# Altium PCB e3_ej4.PcbDoc
Units mm, origin at the board's own origin, x right, y up, seen from the top; angles counter-clockwise.
Board outline 65 x 50 mm, 2 copper layers (Top Layer, Bottom Layer); 20 components, 17 nets, 71 pads, 0 vias.
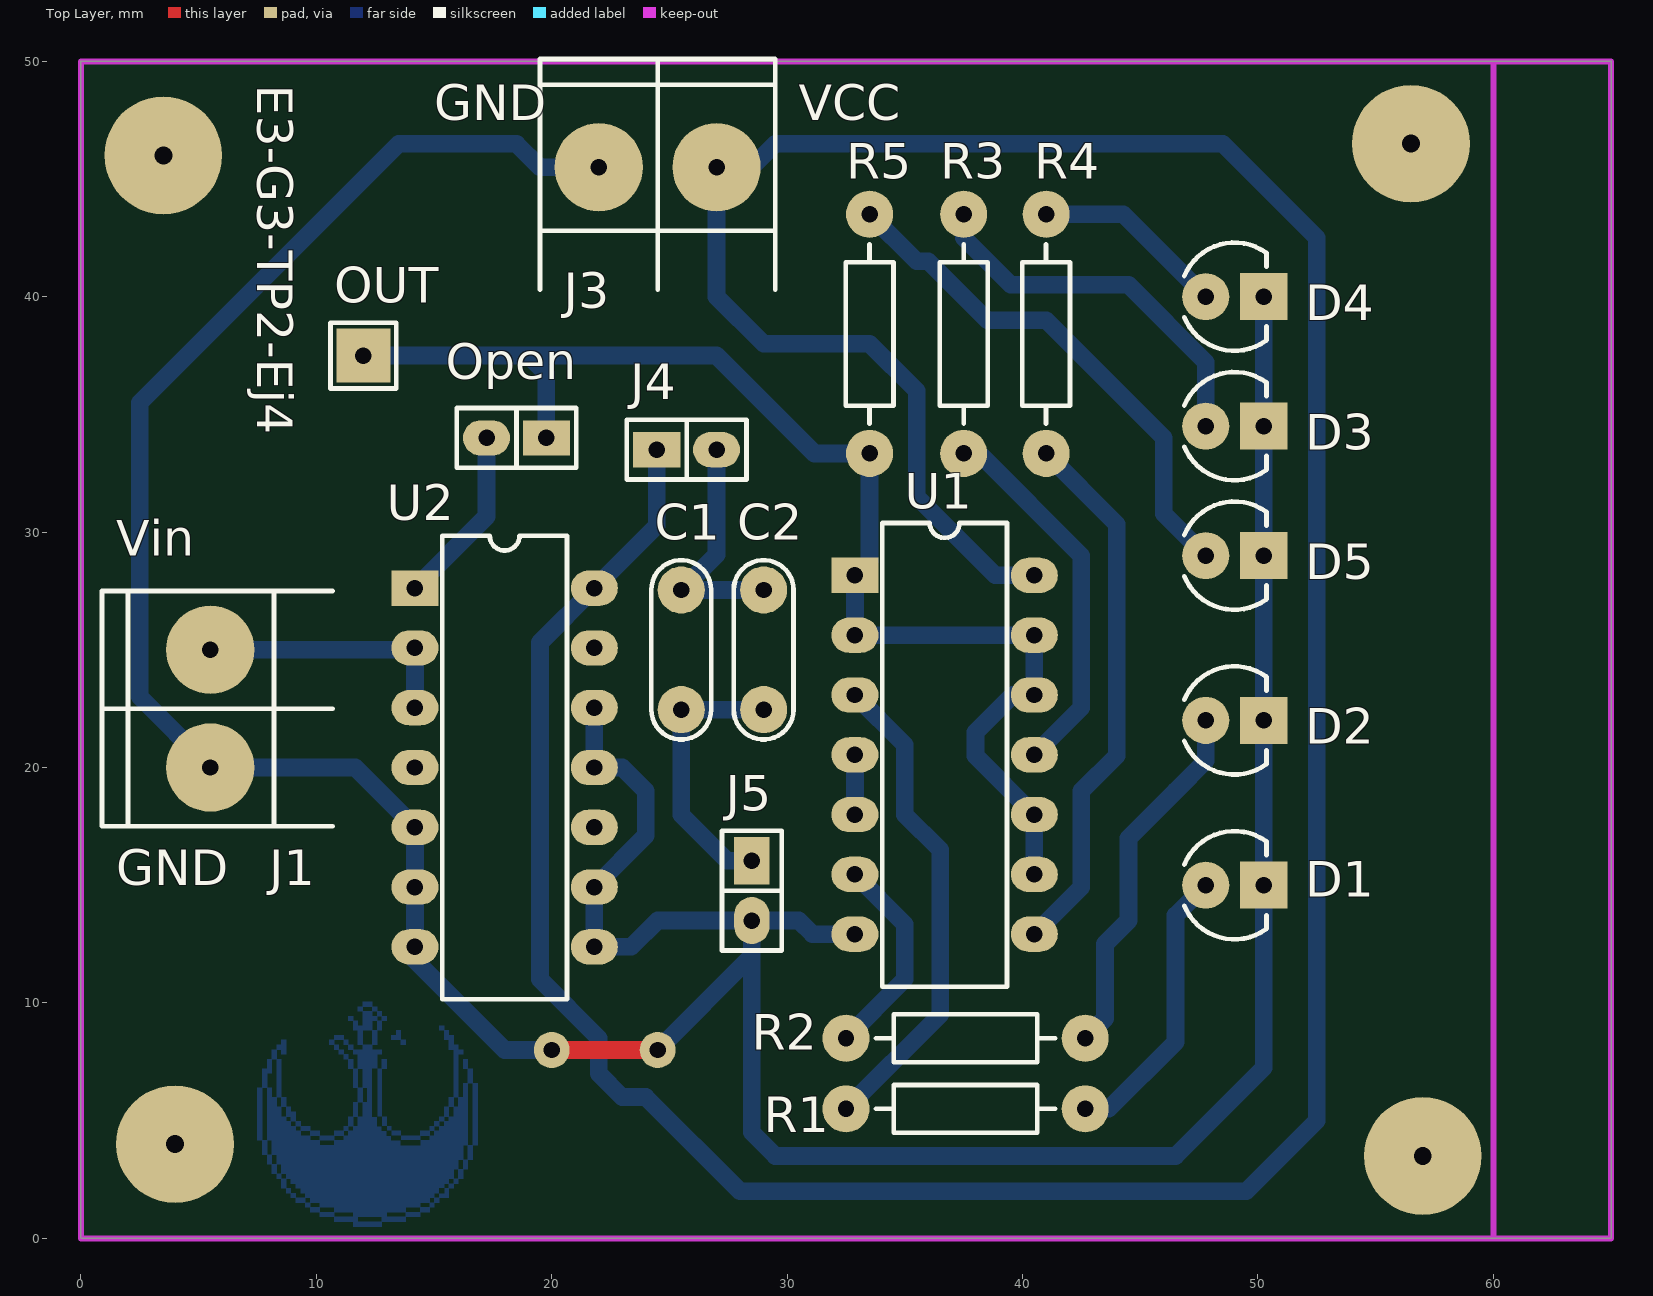
[diagram p0: Top Layer view]
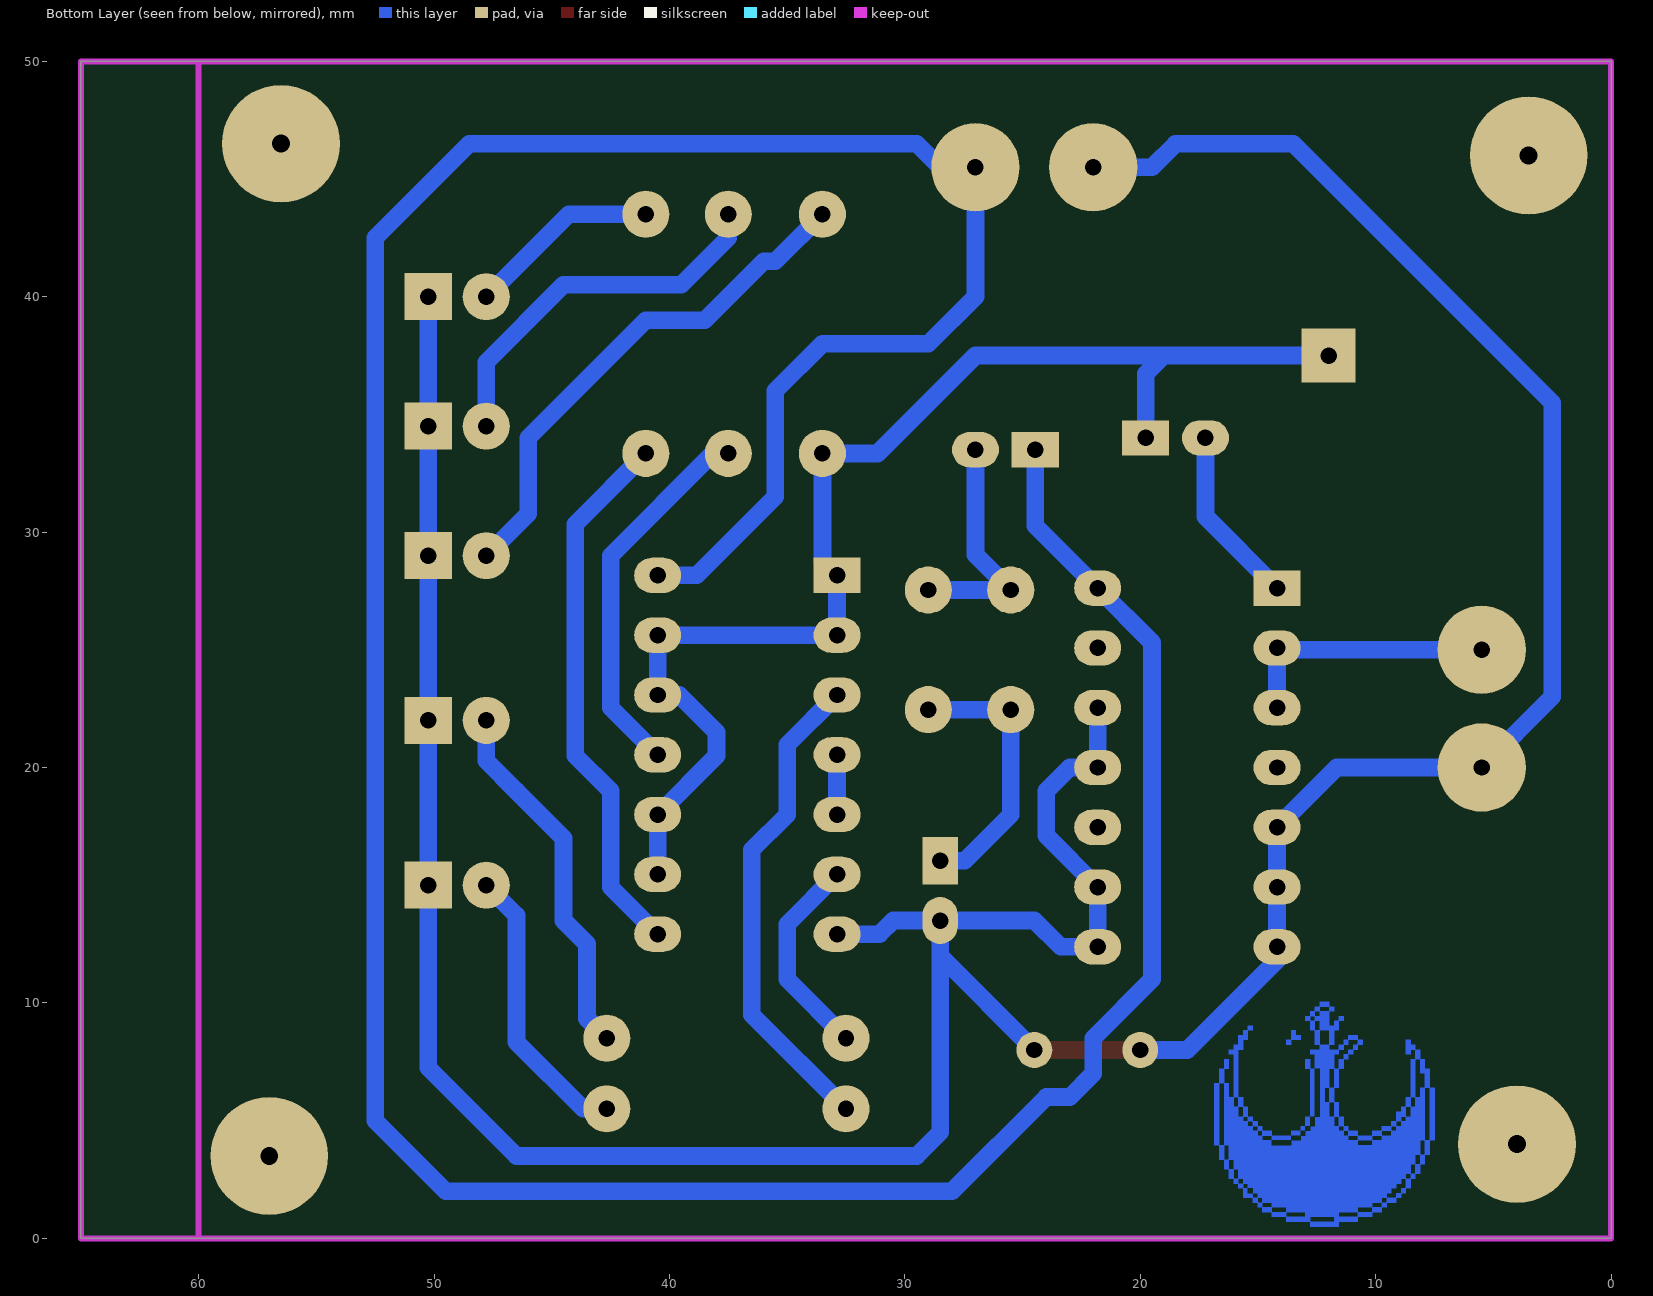
[diagram p1: Bottom Layer view, seen from below]
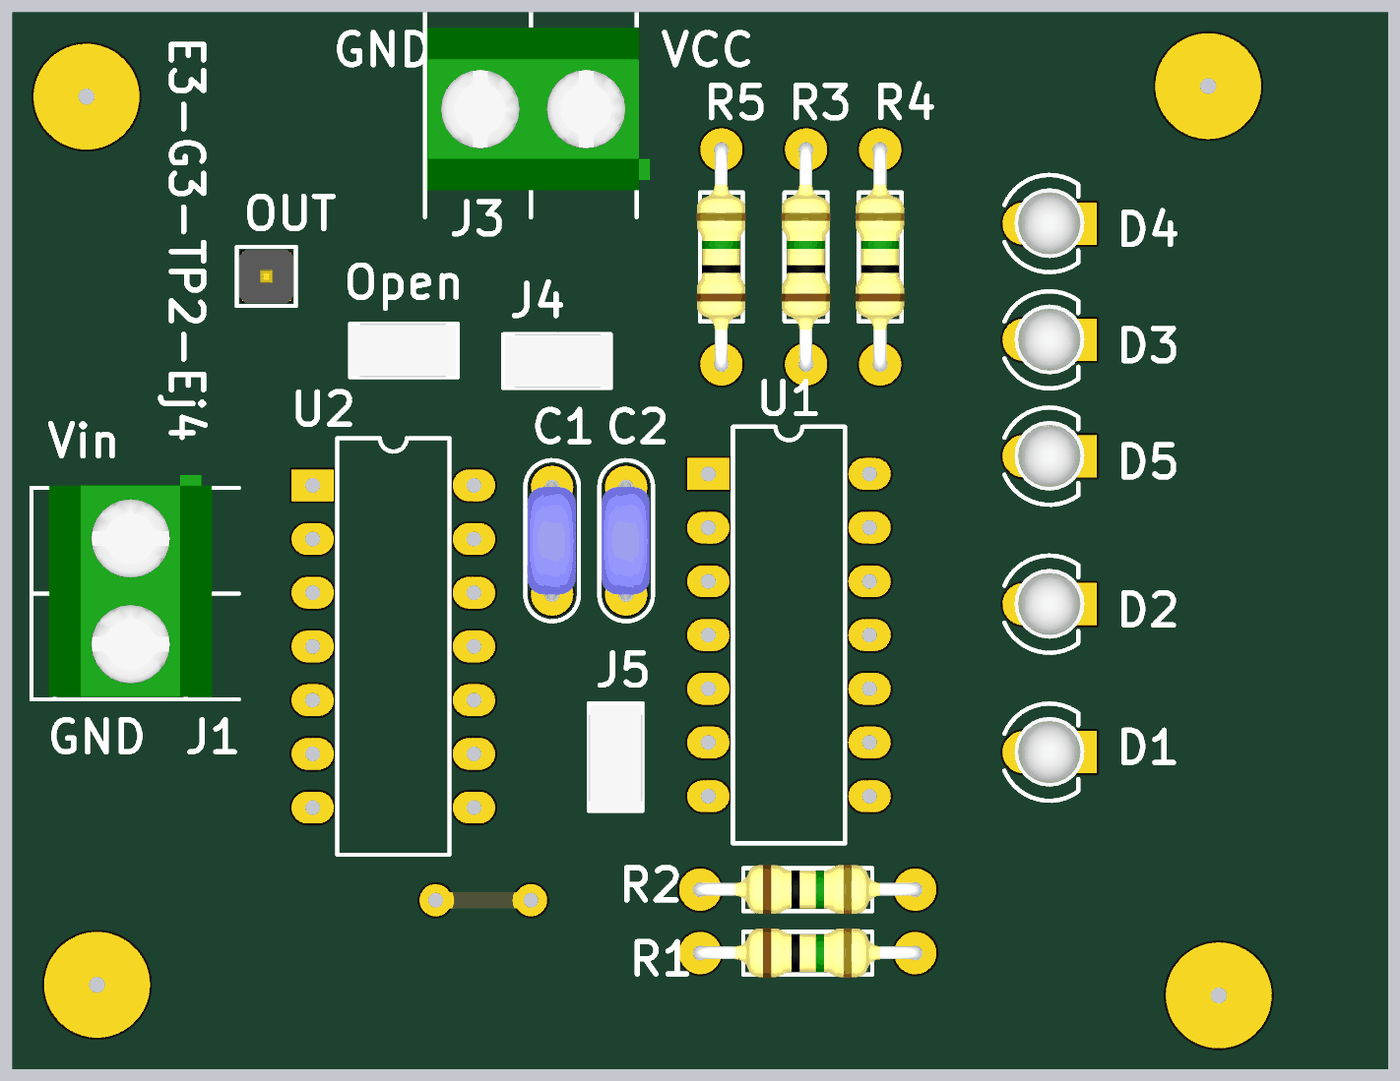
[diagram p2: 3D render of the assembled board from above, using the file's embedded part models]

## Layer stack, top to bottom
Top Solder: solder mask 0.0102, Solder Resist, Dk 3.5
Top Layer: signal copper 0.0356
Dielectric 1: dielectric 0.32, FR-4, Dk 4.8
Bottom Layer: signal copper 0.0356
Bottom Solder: solder mask 0.0102, Solder Resist, Dk 3.5

## Board outline
0,0 65,0 65,50 0,50

## Design rules (kind name [scope] priority, off if disabled: settings)
Clearance [All] p1: gap=0.4 ignorepadtopadclearanceinfootprint=FALSE
PolygonConnect [All] p1: connectstyle=Relief reliefconductorwidth=0.254 reliefentries=4 polygonreliefangle="90 Angle" airgapwidth=0.254
RoutingVias [All] p1: holewidth=0.5 width=2 viastyle="Through Hole" minholewidth=0.5 minwidth=2 maxholewidth=0.5 maxwidth=2
SolderMaskExpansion [All] p1: expansion=0.102
Width [All] p1: maxlimit=0.8 minlimit=0.75 preferedwidth=0.75
30 further rules are at their usual default settings.

## Components (designator, comment, footprint, x,y, rotation, side; value= is the part's Value field where it differs from the comment)
C1 "CAP" CAP200 25.5,25 r270 top
C2 "CAP" CAP200 29,25 r270 top
D1 "LED" LED3 49,15 r0 top
D2 "LED" LED3 49,22 r0 top
D3 "LED" LED3 49,34.5 r0 top
D4 "LED" LED3 49,40 r0 top
D5 "LED" LED3 49,29 r0 top
J1 "Vin" BORNERA2 5.5,22.5 r0 top
J3 "Alimentacion" BORNERA2 24.5,45.5 r270 top
J4 "desacople+" JUMPER2 25.73,33.5 r0 top locked
J5 "descople0" JUMPER2 28.5,14.77 r270 top locked
Open "JUMPER" JUMPER2 18.5,34 r180 top locked (schematic designator J2)
OUT "TP" TPTH 12,37.5 r0 top (schematic designator TP1)
R1 "RES" RES400 32.5,5.5 r0 top
R2 "RES" RES400 32.5,8.5 r0 top
R3 "RES" RES400 37.5,33.34 r90 top
R4 "RES" RES400 41,33.34 r90 top
R5 "RES" RES400 33.5,33.34 r90 top
U1 "SN74LS00N" 646-06 36.69,20.54 r270 top locked
U2 "MC74HC02AN" 646-06 18,20 r270 top locked

## Footprints (in the part's own frame and the unit in brackets; to place one, negate y for a bottom-side part, rotate by r counter-clockwise, add the part's x,y. Pads: shape width x height; smd on the part's side, far side on the other; paste and mask are expansions set on the pad)
646-06 [mm] "DIP; 14 Leads; Row Spacing 7.62 mm; Pitch 2.54 mm"
  rect 1.5x2 hole 0.7: 1(-7.62,-3.81)
  oval 1.5x2 hole 0.7: 2(-5.08,-3.81) 3(-2.54,-3.81) 4(0,-3.81) 5(2.54,-3.81) 6(5.08,-3.81) 7(7.62,-3.81) 8(7.62,3.81) 9(5.08,3.81) 10(2.54,3.81) 11(0,3.81) 12(-2.54,3.81) 13(-5.08,3.81) 14(-7.62,3.81)
  silkscreen extent -9.85,-2.65 9.85,2.65
BORNERA2 [mm] "Bornera con Tornillos 5mm separación"
  round 3.75 hole 0.7: 1(0,2.5) 2(0,-2.5)
  silkscreen extent -4.6,-5 5.2,5, body extent -3.76,-4.89 3.94,5.61, height 10
CAP200 [mm]
  round 2 hole 0.7: 1(-2.54,0) 2(2.54,0)
  silkscreen extent -3.81,-1.27 3.81,1.27, body extent -2.79,-1.17 2.79,1.12, height 6.24
JUMPER2 [mm]
  rect 2x1.5 hole 0.7: 1(-1.27,0)
  oval 2x1.5 hole 0.7: 2(1.27,0)
  silkscreen extent -2.54,-1.27 2.54,1.27, body extent -2.46,-1.27 2.54,1.27, height 9.5
LED3 [mm]
  round 2 hole 0.7: 1(-1.219,0)
  rect 2x2 hole 0.7: 2(1.245,0)
  silkscreen extent -2.13,-2.3 1.36,2.3, body extent -1.65,-1.63 1.65,1.66, height 0.49
RES400 [mm]
  round 2 hole 0.7: 1(0,0) 2(10.16,0)
  silkscreen extent 1.27,-1.02 8.89,1.02, body extent -0.3,-1.14 10.46,1.17, height 2.43
TPTH [mm]
  rect 2.3x2.3 hole 0.7: 1(0,0)
  silkscreen extent -1.4,-1.4 1.4,1.4, body extent -1.27,-1.27 1.27,1.27, height 6.04

## Part data
J1 J3: library part "BORNERA 2"
J4 J5: library part JUMPER
U1: "Quad 2-Input NAND Gate", ComponentAvailability="Not for New Design", ComponentLink1Description="Manufacturer Link", ComponentLink1URL=http://www.onsemi.com/, ComponentLink2Description=Datasheet, ComponentLink2URL=http://www.onsemi.com/pub/Collateral/SN74LS00-D.PDF, DatasheetVersion=Dec-1999, PackageDescription="DIP; 14 Leads; Row Spacing 7.62 mm; Pitch 2.54 mm", PackageReference=646-06, PackageVersion=1995, Published=15-Apr-2002, Publisher="Altium Limited"
U2: "Quad 2-Input NOR Gate", ComponentLink1Description="Manufacturer Link", ComponentLink1URL=http://www.onsemi.com/, ComponentLink2Description=Datasheet, ComponentLink2URL=http://www.onsemi.com/pub/Collateral/MC74HC02A-D.PDF, DatasheetVersion=Mar-2000, PackageDescription="DIP; 14 Leads; Row Spacing 7.62 mm; Pitch 2.54 mm", PackageReference=646-06, PackageVersion=1995, Published=15-Apr-2002, Publisher="Altium Limited"

## Free pads (board coordinates)
  round 1.524 hole 0.7: 2(20,8) 3(24.5,8) 4(24.5,8) 5(20,8)
  round 5 hole 0.762: 6(56.5,46.5) 7(3.5,46) 8(4,4) 8(57,3.5)

## Nets (pads, with @x,y where several pads share a name; then routed paths per layer and width w, separated by ;. In a path a pad name is that pad's centre, name@x,y a point inside that pad or via, vN(x,y) a via of type N, cw(c..) or ccw(c..) an arc to the next point about the centre after c; other vN are vias at no path point)
GND: D1.2 D2.2 D3.2 D4.2 D5.2 J1.2 J3.2 J5.2 pad.2 pad.3 pad.4 pad.5 U1.7 U2.5 U2.6 U2.7 U2.8 U2.9 U2.11 U2.12 | length 164.1
  Top Layer w0.75: pad.2 pad.3
  Bottom Layer w0.75: pad.2 18,8 14.19,11.81 U2.7 U2.6 U2.5 11.65,20 J1.2 2.5,23 2.5,35.5 13.5,46.5 18.5,46.5 19.5,45.5 J3.2 ; U2.12 U2.11 23,20 24,19 24,17.11 U2.9 U2.8 23.38,12.38 24.5,13.5 J5.2 ; pad.3 28.5,12 ; U1.7 31.08,12.92 30.5,13.5 J5.2 ; D4.2 D3.2 D5.2 D2.2 D1.2 50.245,7.245 46.5,3.5 29.5,3.5 28.5,4.5 28.5,12 ; 28.5,12 J5.2
NetC1_1: C1.1 C2.1 J4.2 | length 10.1
  Bottom Layer w0.75: J4.2 27,29.04 C1.1 C2.1
NetC1_2: C1.2 C2.2 J5.1 | length 11.8
  Bottom Layer w0.75: J5.1 27.46,16.04 25.5,18 C1.2 C2.2
NetD1_1: D1.1 R1.2 | length 12.2
  Bottom Layer w0.75: R1.2 43.66,5.5 46.5,8.34 46.5,13.719 D1.1
NetD2_1: D2.1 R2.2 | length 15.6
  Bottom Layer w0.75: R2.2 43.5,9.34 43.5,12.5 44.5,13.5 44.5,17 46.5,19 47.781,20.281 D2.1
NetD3_1: D3.1 R3.2 | length 16.2
  Bottom Layer w0.75: R3.2 37.5,42.5 39.5,40.5 44.5,40.5 47.781,37.219 D3.1
NetD4_1: D4.1 R4.2 | length 8.2
  Bottom Layer w0.75: R4.2 44.281,43.5 D4.1
NetD5_1: D5.1 R5.2 | length 22.2
  Bottom Layer w0.75: R5.2 35.5,41.5 36,41.5 38.5,39 41,39 46,34 46,30.781 D5.1
NetJ2_1: Open.1 OUT.1 R5.1 U1.1 U1.2 U1.9 U1.10 U1.12 U1.13 | length 55.6
  Bottom Layer w0.75: OUT.1 19,37.5 ; Open.1 19.77,36.73 19,37.5 ; U1.2@32.76,25.5 U1.2 ; U1.9 U1.10 38,20.5 38,21.5 39.58,23.08 U1.12 U1.13 U1.2 ; 19,37.5 27,37.5 31.16,33.34 R5.1 33.5,28.78 U1.1 U1.2
NetJ2_2: Open.2 U2.1 | length 7.6
  Bottom Layer w0.75: U2.1 17.23,30.66 Open.2
NetR1_1: R1.1 U1.3 | length 20.7
  Bottom Layer w0.75: R1.1 36.5,9.5 36.5,16.5 35,18 35,20.96 U1.3
NetR2_1: R2.1 U1.6 | length 8.9
  Bottom Layer w0.75: R2.1 35,11 35,13.34 U1.6
NetR3_1: R3.1 U1.11 | length 16.1
  Bottom Layer w0.75: R3.1 38.16,33.34 42.5,29 42.5,22.54 U1.11
NetR4_1: R4.1 U1.8 | length 23.1
  Bottom Layer w0.75: U1.8 42.5,14.92 42.5,19 44,20.5 44,30.34 R4.1
NetU1_4: U1.4 U1.5 | length 2.5
  Bottom Layer w0.75: U1.5 U1.4
VCC: J3.1 J4.1 U1.14 U2.14 | length 155
  Bottom Layer w0.75: J4.1 24.46,30.27 U2.14 19.5,25.31 19.5,11 22,8.5 22,7 23,6 24,6 28,2 49.5,2 52.5,5 52.5,42.5 48.5,46.5 29.5,46.5 28.5,45.5 J3.1 27,40 29,38 33.5,38 35.5,36 35.5,31.5 38.84,28.16 U1.14
Vin: J1.1 U2.2 U2.3 | length 11.3
  Bottom Layer w0.75: J1.1 14.11,25 U2.2 U2.3
pads on no net: U2.4 U2.10 U2.13

## Keep-outs
Keep-Out Layer:
  lines w0.254: 15,0 0,0 ; 60,0 60,50 ; 0,0 0,50 65,50 65,0 0,0

## Other copper
Bottom Layer:
  region: 579 vertices and 2 holes, not listed, extent 7.5,0.5 16.644,9.847
  region: 16.441,7.409 16.441,7.206 16.644,7.206 16.644,7.002 16.644,6.799 16.644,6.596 16.847,6.596 16.847,6.393 16.847,6.19 16.847,5.986 16.847,5.783 16.847,5.58 16.847,5.377 16.847,5.174 16.847,4.97 16.847,4.767 16.847,4.564 16.847,4.361 16.847,4.158 16.847,3.954 16.644,3.954 16.644,4.158 16.644,4.361 16.644,4.564 16.644,4.767 16.644,4.97 16.644,5.174 16.644,5.377 16.644,5.58 16.644,5.783 16.644,5.986 16.644,6.19 16.644,6.393 16.644,6.596 16.441,6.596 16.441,6.799 16.441,7.002 16.441,7.206 16.238,7.206 16.238,7.409 16.238,7.612 16.441,7.612
  region: 12.377,9.847 12.58,9.847 12.58,9.644 12.783,9.644 12.783,9.441 12.986,9.441 12.986,9.238 12.783,9.238 12.783,9.441 12.58,9.441 12.58,9.644 12.377,9.644 12.377,9.847 11.97,9.847 11.97,10.05 12.377,10.05
  region: 13.596,8.628 13.596,8.425 13.799,8.425 13.799,8.222 13.596,8.222 13.596,8.425 13.19,8.425 13.19,8.628 13.393,8.628 13.393,8.831 13.596,8.831
  region: 8.719,8.222 8.719,8.018 8.719,7.815 8.516,7.815 8.516,8.018 8.313,8.018 8.313,8.222 8.516,8.222 8.516,8.425 8.719,8.425
  region: 12.986,7.409 12.986,7.206 12.783,7.206 12.783,7.409 12.783,7.612 12.986,7.612

## Silkscreen, mask and mechanical layers (free items; w line width, h text height)
Top Overlay:
  text "E3-G3-TP2-Ej4" at 7.5,49 h1.52 r270
  text "GND" at 15,47.5 h1.52
  text "VCC" at 30.5,47.5 h1.52
  text "Vin" at 1.5,29 h1.52
  text "GND" at 1.5,15 h1.52